# Altium PCB Starboard Solar Panel.PcbDoc (part 1 of 2)
Units mm, origin at the board's own origin, x right, y up, seen from the top; angles counter-clockwise.
Board outline 327.5 x 87 mm, 2 copper layers (Top Layer, Bottom Layer), stack 1.58 mm thick; 64 components, 43 nets, 245 pads, 1257 vias.
Unrouted connection lines stored in the file: 47.
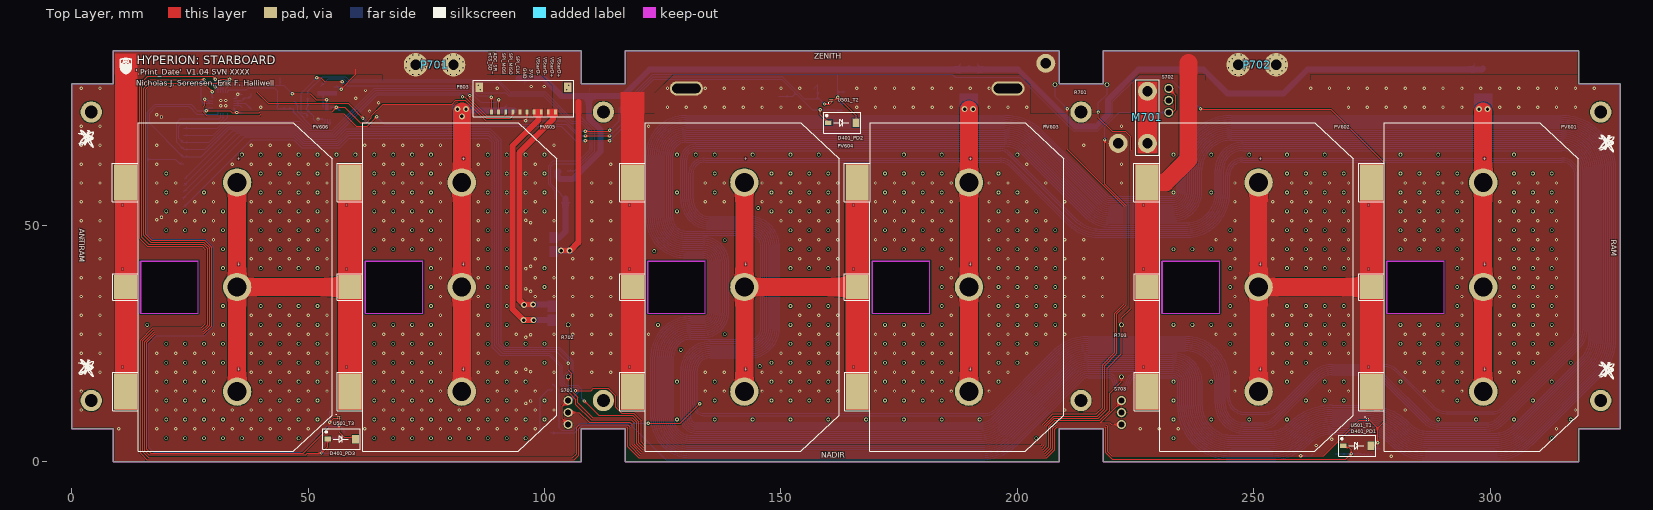
[diagram p0: Top Layer view]
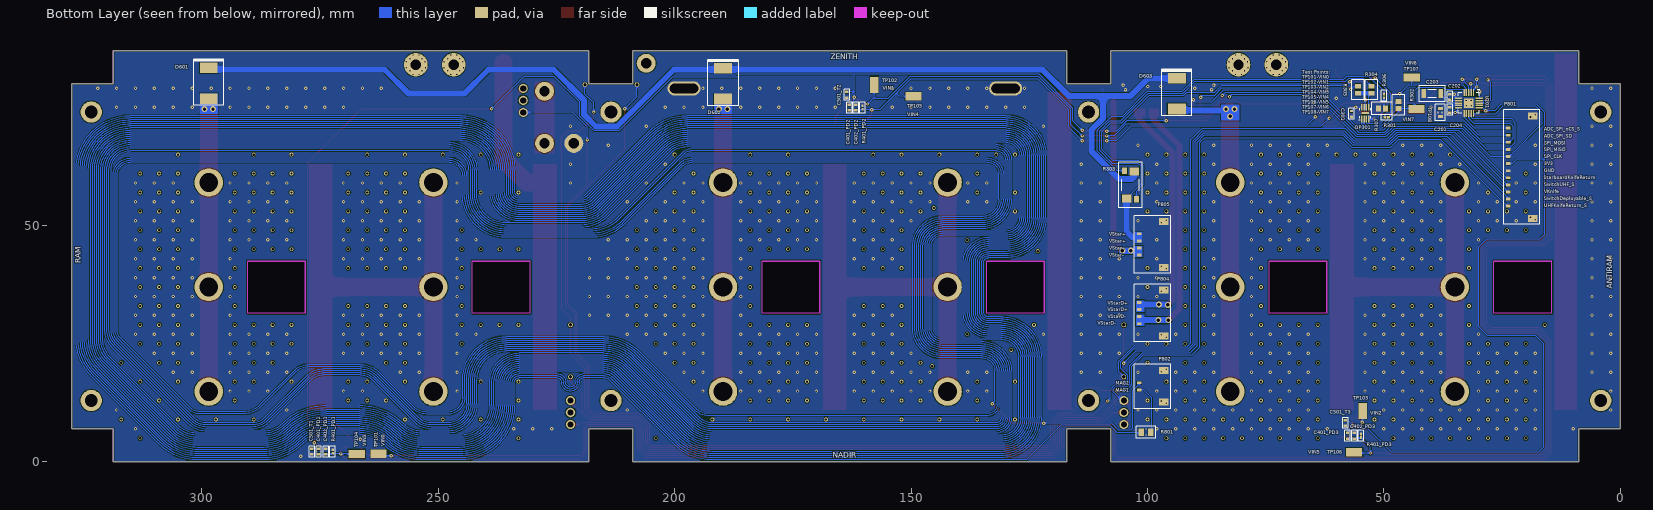
[diagram p1: Bottom Layer view, seen from below]
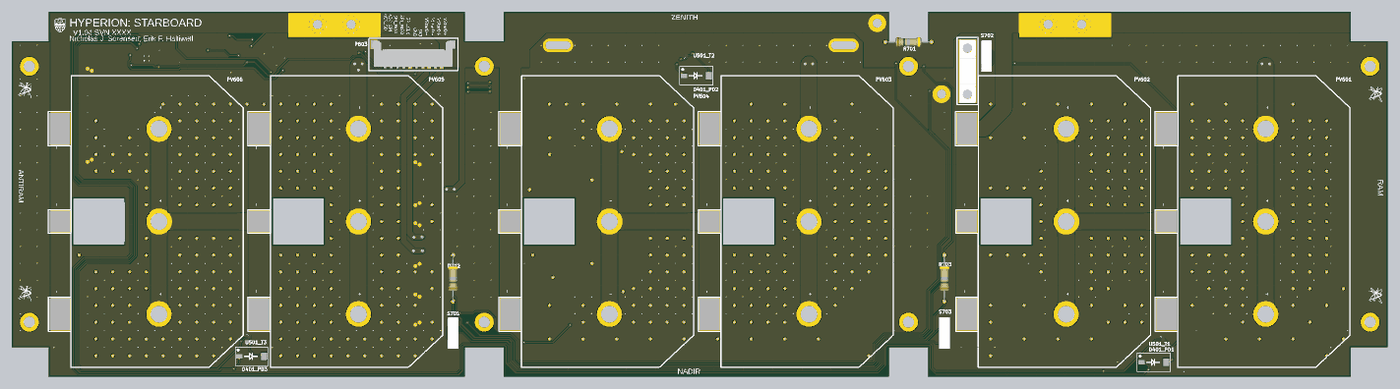
[diagram p3: 3D render of the assembled board from above, using the file's embedded part models]

## Layer stack, top to bottom
Top Solder: solder mask 0.0102, Solder Resist, Dk 3.5
Top Layer: signal copper 0.0711
Dielectric 1: dielectric 1.438, FR-4, Dk 4.8
Bottom Layer: signal copper 0.0711
Bottom Solder: solder mask 0.0102, Solder Resist, Dk 3.5

## Board outline
0,7 8.8,7 8.8,0 107.8,0 107.8,7 117.1,7 117.1,0 208.8,0 208.8,7 218.1,7 218.1,0 318.7,0 318.7,7 327.5,7 327.5,80 318.7,80 318.7,87 218.1,87 218.1,80 208.8,80 208.8,87 117.1,87 117.1,80 107.8,80 107.8,87 8.8,87 8.8,80 0,80
cut-out: 14.6,31.5 26.75,31.5 26.75,42.5 14.6,42.5
cut-out: 278.1,31.5 290.25,31.5 290.25,42.5 278.1,42.5
cut-out: 230.6,31.5 242.75,31.5 242.75,42.5 230.6,42.5
cut-out: 169.35,31.5 181.5,31.5 181.5,42.5 169.35,42.5
cut-out: 121.85,31.5 134,31.5 134,42.5 121.85,42.5
cut-out: 62.1,31.5 74.25,31.5 74.25,42.5 62.1,42.5

## Design rules (kind name [scope] priority, off if disabled: settings)
BoardOutlineClearance [All] p1: gap=0.254 ignorepadtopadclearanceinfootprint=FALSE
Clearance [All] p1: gap=0.178 ignorepadtopadclearanceinfootprint=FALSE
HoleSize [All] p1: absolutevalues=TRUE maxlimit=6 minlimit=0.2 maxpercent=80.000 minpercent=20.000
MinimumAnnularRing [All] p1: minimumring=0.15
MinimumSolderMaskSliver [All] p1: minsoldermaskwidth=0.127
PolygonConnect [All] p1: connectstyle=Direct reliefconductorwidth=0.254 reliefentries=4 polygonreliefangle="90 Angle" airgapwidth=0.254
RoutingCorners [All] p1: cornerstyle=Round minsetback=2.54 maxsetback=2.54
RoutingVias [All] p1: holewidth=0.33 width=0.711 viastyle="Through Hole" minholewidth=0.2 minwidth=0.711 maxholewidth=6 maxwidth=2.54
SilkToSilkClearance [All] p1: silktosilkclearance=0.127
SilkToSolderMaskClearance [IsPad] p1: minsilkscreentomaskgap=0.025 clearancetoexposedcopper=TRUE
SolderMaskExpansion [All] p1: expansion=0.102 istentingtop=FALSE
Width [All] p1: maxlimit=7.62 minlimit=0.203 preferedwidth=0.254
25 further rules are at their usual default settings.

## Classes and differential pairs
channel class Temp_Sensor: T1 T2 T3
channel class Photodiode_Sun_Sensor: T1 T2 T3
component class T3: C501_T3 U501_T3
component class T2: C501_T2 U501_T2
component class T1: C501_T1 U501_T1
component class Starboard: TP101 TP102 TP103 TP104 TP105 TP106 TP107 TP108
component class "Starboard Headers": P801 P802 P803 P804 P805 R801
component class PD3: C401_PD3 C402_PD3 D401_PD3 R401_PD3
component class PD2: C401_PD2 C402_PD2 D401_PD2 R401_PD2
component class PD1: C401_PD1 C402_PD1 D401_PD1 R401_PD1
component class "Mechanical Interfacing": M701 P701 P702 R701 R702 R703 S701 S702 S703
component class "Current and Voltage Sensors": C301 OP301 R301 R302 R303 R304 R305 R306 R307
net class VIN[0..7]: VIN0 VIN1 VIN2 VIN3 VIN4 VIN5 VIN6 VIN7
component class "U_AD7298 12-Bit SPI ADC": C201 C202 C203 C204 U201
component class "Photovoltaic Array": D601 D602 D603 PV601 PV602 PV603 PV604 PV605 PV606

## Components (designator, comment, footprint, x,y, rotation, side; value= is the part's Value field where it differs from the comment)
C201 "" TDK-CGA3E 38.05,73.9 r90 bottom value=1µF
C202 "" TDK-CGA2B 36.05,77.2 r90 bottom value=0.1µF
C203 "" TDK-CGA5L 39.8,77.9 r0 bottom value=10µF
C204 "" TDK-CGA2B 36.05,74.45 r90 bottom value=0.1µF
C301 "Cap" TDK-CGA2B 56.85,73.625 r90 bottom value=0.1µF
C401_PD1 "Cap" TDK-CGA2B 275.25,2.2 r90 bottom value=0.1µF (schematic designator C401)
C401_PD2 "Cap" TDK-CGA2B 163.05,74.95 r90 bottom value=0.1µF (schematic designator C401)
C401_PD3 "Cap" TDK-CGA2B 57.7,5.55 r90 bottom value=0.1µF (schematic designator C401)
C402_PD1 "Cap" TDK-CGA2B 273.75,2.2 r270 bottom value=100pF (schematic designator C402)
C402_PD2 "Cap" TDK-CGA2B 161.65,74.95 r270 bottom value=100pF (schematic designator C402)
C402_PD3 "Cap" TDK-CGA2B 56.25,5.55 r270 bottom value=100pF (schematic designator C402)
C501_T1 "Cap" TDK-CGA2B 276.7,2.2 r90 bottom value=0.1µF (schematic designator C501)
C501_T2 "Cap" TDK-CGA2B 163.55,77.65 r90 bottom value=0.1µF (schematic designator C501)
C501_T3 "Cap" TDK-CGA2B 58.15,8.25 r90 bottom value=0.1µF (schematic designator C501)
D401_PD1 "PDB-C160SMCT-ND" PDB-C160SM 268.9,3.428 r0 top (schematic designator D401)
D401_PD2 "PDB-C160SMCT-ND" PDB-C160SM 160,71.75 r0 top (schematic designator D401)
D401_PD3 "PDB-C160SMCT-ND" PDB-C160SM 54.15,4.85 r0 top (schematic designator D401)
D601 "MBRS410L" ONS-875 298.5,80.1 r90 bottom
D602 "MBRS410L" ONS-875 189.75,80 r90 bottom
D603 "MBRS410L" ONS-875 93.8,77.9 r90 bottom
M701 "Antenna_Saddle" ANTENNA_SADDLE 227.5,67.375 r90 top
OP301 "OPA2333" TI-DSG0008A 53.95,73.775 r90 bottom
P701 "Mounting_Hole" DEPHINGE_MOUNTING_HOLE_BODY 80.75,84 r180 top
P702 "Mounting_Hole" DEPHINGE_MOUNTING_HOLE_BODY 254.7,84 r180 top
P801 "WM16219CT-ND" MOLX-5040501291 23.7,62.35 r90 bottom
P802 "WM25693CT-ND" MOLX-5040500291 101.75,16 r90 bottom
P803 "WM10138CT-ND" MOLX-5040501091 95.55,74 r180 top
P804 "WM10137CT-ND" MOLX-5040500491 101.75,31.5 r90 bottom
P805 "WM10137CT-ND" MOLX-5040500491 101.75,46 r90 bottom
PV601 "XTJPrime" "XTJ PRIME" 298.5,37 r90 top
PV602 "XTJPrime" "XTJ PRIME" 251,37 r90 top
PV603 "XTJPrime" "XTJ PRIME" 189.75,37 r90 top
PV604 "XTJPrime" "XTJ PRIME" 142.25,37 r90 top
PV605 "XTJPrime" "XTJ PRIME" 82.5,37 r90 top
PV606 "XTJPrime" "XTJ PRIME" 35,37 r90 top
R301 "0.1% 1/16W" PANA-ERA2A 49.404,72.884 r180 bottom value=6.2k
R302 "0.1% 1/8W" PANA-ERA6A 46.922,75.5 r270 bottom value=1M
R303 "Res Sense" VSH-2512R4C 103.586,58.6 r270 bottom value=0.01
R304 "0.1% 1/8W" PANA-ERA6A 52.65,78.725 r270 bottom value=1M
R305 "0.1% 1/8W" PANA-ERA6A 55.45,78.725 r270 bottom value=845k
R306 "0.1% 1/16W" PANA-ERA2A 49.97,77.425 r270 bottom value=6.2k
R307 "0.1% 1/8W" PANA-ERA6A 50.4,74.75 r0 bottom value=1M
R401_PD1 "0.1% 1/16W" PANA-ERA2A 272.3,2.2 r270 bottom value=24k (schematic designator R401)
R401_PD2 "0.1% 1/16W" PANA-ERA2A 160.25,74.95 r270 bottom value=24k (schematic designator R401)
R401_PD3 "0.1% 1/16W" PANA-ERA2A 54.85,5.55 r270 bottom value=24k (schematic designator R401)
R701 "Res3" VSH-CPF1 207.95,79.8 r0 top value=21
R702 "Res3" VSH-CPF1 105,18 r90 top value=21
R703 "Res3" VSH-CPF1 222,18 r90 top value=21
R801 "Res3" VSH-0805MCU 100.3,6.3 r180 bottom value=0
S701 "AV4424" PANA-AV4424 105,13 r270 top
S702 "AV4424" PANA-AV4424 232,79 r270 top
S703 "AV4424" PANA-AV4424 222,13 r270 top
TP101 "5017" KS-5017 262.6,1.774 r180 bottom
TP102 "5017" KS-5017 157.8,79.75 r90 bottom
TP103 "5017" KS-5017 54.45,10.8 r90 bottom
TP104 "5017" KS-5017 267.2,1.7 r180 bottom
TP105 "5017" KS-5017 149.5,77.325 r180 bottom
TP106 "5017" KS-5017 56.3,2.1 r180 bottom
TP107 "5017" KS-5017 44.1,81.3 r180 bottom
TP108 "5017" KS-5017 43.13,74.65 r180 bottom
U201 "AD7298" ADI-CP-20-8 32.05,75.9 r270 bottom
U501_T1 "LMT70" TI-YFQ0004 274.05,9 r0 top (schematic designator U501)
U501_T2 "LMT70" TI-YFQ0004 160.55,76.45 r90 top (schematic designator U501)
U501_T3 "LMT70" TI-YFQ0004 56.5,9.45 r0 top (schematic designator U501)

## Footprints (in the part's own frame and the unit in brackets; to place one, negate y for a bottom-side part, rotate by r counter-clockwise, add the part's x,y. Pads: shape width x height; smd on the part's side, far side on the other; paste and mask are expansions set on the pad)
ADI-CP-20-8 [mm] "QFN, 20-Leads, Body 4.00x4.00mm, Pitch 0.50mm, Thermal Pad 2.55x2.55mm, IPC Low Density"
  rect 1.5x0.3 smd: 1(-2.2,1) 2(-2.2,0.5) 3(-2.2,0) 4(-2.2,-0.5) 5(-2.2,-1) 11(2.2,-1) 12(2.2,-0.5) 13(2.2,0) 14(2.2,0.5) 15(2.2,1)
  rect 0.3x1.5 smd: 6(-1,-2.2) 7(-0.5,-2.2) 8(0,-2.2) 9(0.5,-2.2) 10(1,-2.2) 16(1,2.2) 17(0.5,2.2) 18(0,2.2) 19(-0.5,2.2) 20(-1,2.2)
  rect 2x2 smd: 21(0,0)
  silkscreen extent -2.97,-2.2 2.2,2.2, body extent -2.07,-2.07 2.07,2.07, height 0.8
ANTENNA_SADDLE [mm] "Saddle for attaching antenna to panel"
  round 4 hole 2.2: 8(0,0) 8(11,0)
  Top Layer region: -2.125,-2.125 13.125,-2.125 13.125,2.125 -2.125,2.125
  silkscreen extent -2.5,-2.5 13.5,2.5, body extent -2.06,-2 12.94,2, height 6.91
DEPHINGE_MOUNTING_HOLE_BODY [mm]
  round 5 hole 2.2: 1(0,0) 1(8,0)
  Top Layer region: 3.2,-3.2
KS-5017 [mil] "Testpoint Lug Mini SMD 27X10X152"
  rect 135x70 smd: 1(0,0)
  body extent -53,-20 53,20, height 60
MOLX-5040500291 [mm]
  rect 0.6x1 smd: 1(-0.75,0) 2(0.75,0)
  oval 0.711x0.711 hole 0.33: M1(-3.605,-5.7) M1(-3.105,-4.7) M2(3.105,-4.7) M2(3.605,-5.7)
  rect 1.5x2 smd: M1(-3.355,-5.2) M2(3.355,-5.2)
  silkscreen extent -4.7,-6.7 4.7,1
MOLX-5040500491 [mm]
  rect 0.6x1 smd: 1(-2.25,0) 2(-0.75,0) 3(0.75,0) 4(2.25,0)
  oval 0.711x0.711 hole 0.33: M1(-5.105,-5.7) M1(-4.605,-4.7) M2(4.605,-4.7) M2(5.105,-5.7)
  rect 1.5x2 smd: M1(-4.855,-5.2) M2(4.855,-5.2)
  silkscreen extent -6.1,-6.7 6.1,1, body extent -5.28,-6.05 5.28,0.39, height 2.01
MOLX-5040501091 [mm]
  rect 0.6x1 smd: 1(-6.75,0) 2(-5.25,0) 3(-3.75,0) 4(-2.25,0) 5(-0.75,0) 6(0.75,0) 7(2.25,0) 8(3.75,0) 9(5.25,0) 10(6.75,0)
  oval 0.711x0.711 hole 0.33: M1(-9.605,-5.7) M1(-9.105,-4.7) M2(9.105,-4.7) M2(9.605,-5.7)
  rect 1.5x2 smd: M1(-9.355,-5.2) M2(9.355,-5.2)
  silkscreen extent -10.6,-6.7 10.6,1, body extent -9.78,-6.05 9.77,0.39, height 2.01
MOLX-5040501291 [mm]
  rect 0.6x1 smd: 1(-8.25,0) 2(-6.75,0) 3(-5.25,0) 4(-3.75,0) 5(-2.25,0) 6(-0.75,0) 7(0.75,0) 8(2.25,0) 9(3.75,0) 10(5.25,0) 11(6.75,0) 12(8.25,0)
  oval 0.711x0.711 hole 0.33: M1(-11.105,-5.7) M1(-10.605,-4.7) M2(10.605,-4.7) M2(11.105,-5.7)
  rect 1.5x2 smd: M1(-10.855,-5.2) M2(10.855,-5.2)
  silkscreen extent -12.1,-6.7 12.1,1, body extent -11.27,-6.05 11.27,0.39, height 2.01
ONS-875 [mm]
  rect 2.25x3.79 smd: 1(-3.25,0) 2(3.25,0)
  silkscreen extent -4.7,-3.2 5.1,3.2, body extent -3.97,-2.95 3.98,2.95, height 2.32
PANA-AV4424 [mm]
  round 1.905 hole 1.27: 1(2.54,0) 2(0,0) 3(5.08,0)
  body extent -1.21,-1.25 6.29,1.25, height 5.81
PANA-ERA2A [mm] "Chip Resistor, 2-Leads, Body 1.00x0.52mm, IPC High Density"
  rect 0.57x0.5 smd: 1(-0.376,0) 2(0.376,0)
  silkscreen extent -1.15,-0.58 1.15,0.58, body extent -0.55,-0.3 0.55,0.3, height 0.4
PANA-ERA6A [mm] "Chip Resistor, 2-Leads, Body 2.00x1.25mm, IPC High Density"
  rect 1x1.25 smd: 1(-0.75,0) 2(0.75,0)
  silkscreen extent -2.15,-1.3 2.15,1.3, body extent -1.1,-0.67 1.1,0.67, height 0.6
PDB-C160SM [mm] "Photodiode"
  rect 1.45x1 smd: 1(0,0)
  rect 1.45x1.8 smd: 2(5.9,0)
  silkscreen extent -1,-2.2 6.9,2.2
TDK-CGA2B [mm] "Chip Capacitor, 2-Leads, Body 1.00x0.50mm, IPC Low Density"
  rect 0.52x0.72 smd: 1(-0.6,0) 2(0.6,0)
  silkscreen extent -1.15,-0.58 1.15,0.58, body extent -0.52,-0.28 0.53,0.27, height 0.5
TDK-CGA3E [mm] "Chip Capacitor, 2-Leads, Body 1.60x0.80mm, IPC Low Density"
  rect 0.65x1.05 smd: 1(-0.85,0) 2(0.85,0)
  silkscreen extent -1.7,-1.05 1.7,1.05, body extent -0.85,-0.45 0.85,0.45, height 0.8
TDK-CGA5L [mm] "Chip Capacitor, 2-Leads, Body 3.20x1.60mm, IPC Low Density"
  rect 0.95x1.9 smd: 1(-1.775,0) 2(1.775,0)
  silkscreen extent -2.75,-1.7 2.75,1.7, body extent -1.7,-0.9 1.7,0.9, height 1.6
TI-DSG0008A [mm] "SON, 8-Leads, Body 2.00x2.00mm, Pitch 0.50mm, Thermal Pad 1.60x0.69mm, IPC Low Density"
  rect 1.4x0.3 smd: 1(-1.245,0.75) 2(-1.245,0.25) 3(-1.245,-0.25) 4(-1.245,-0.75) 5(1.245,-0.75) 6(1.245,-0.25) 7(1.245,0.25) 8(1.245,0.75)
  rect 0.4x1.6 smd: 9(0,0)
  silkscreen extent -1.5,-1.2 1.05,1.25, body extent -1.05,-1.05 1.05,1.05, height 0.8
TI-YFQ0004 [mm] "BGA, 4-Leads, Body 0.88x0.88mmx0.68mm, Pitch 0.40mm"
  round 0.22 smd: A1(-0.2,0.2) A2(0.2,0.2) B1(-0.2,-0.2) B2(0.2,-0.2)
  silkscreen extent -0.59,0.5 -0.5,0.59, body extent -0.44,-0.44 0.44,0.44, height 0.67
VSH-0805MCU [mm] "Chip Resistor, 2-Leads, Body 2.00x1.25mm, IPC Low Density"
  rect 1.15x1.5 smd: 1(-1.025,0) 2(1.025,0)
  silkscreen extent -2.1,-1.25 2.1,1.25, body extent -1.05,-0.7 1.05,0.7, height 0.55
VSH-2512R4C [mm]
  rect 1.65x2.01 smd: 1(-2.855,0.835) 2(2.855,-0.835)
  rect 1.39x1.14 smd: 3(2.999,1.27) 4(-2.999,-1.27)
  silkscreen extent -4.8,-2.45 4.8,2.45
VSH-CPF1 [mm] "RESISTOR METAL FILM 1W 1.00K OHM"
  round 1 hole 0.7: 1(0,0) 2(11,0)
  body extent 0.25,-1.16 10.76,2.29, height 3.81
"XTJ PRIME" [mil] "Spectrolab Solar Cell"
  round 236.22 hole 157.48: 1(-870.5,0) 1(0,0) 1(870.5,0)
  rect 300x190 smd: 2(-870.5,930) 2(870.5,930)
  rect 200x190 smd: 2(0,930)
  silkscreen extent -1369,-790 1369,1038, body extent -1356,-778 1356,778, height 13

## Part data
C201: library part PC-TDK-02603, "CAP CER 1UF 25V X7R 0603", Manufacturer Part Number=CGA3E1X7R1E105K080AC, Supplier Part Number 1=445-6931-1-ND, Temperature Coefficient=X7R, Tolerance=±10%, Voltage - Rated=25V, Applications=Automotive, Index=2603, LatestRevisionDate=3/16/2016, LatestRevisionNote=..., PackageReference="0603 (1608 Metric)", Part Number=PC-TDK-02603, Published=3/16/2016, Publisher=AlbertaSat, Supplier 1=Digi-key, Supplier Link=http://www.digikey.ca/product-search/en?keywords=445-6931-1-ND
C202 C204 C401_PD1 C401_PD2 C401_PD3 C501_T1 C501_T2 C501_T3: library part PC-TDK-02259, "CAP CER 0.1UF 50V X7R 0402", Manufacturer Part Number=CGA2B3X7R1H104K050BB, Supplier Part Number 1=445-6899-1-ND, Temperature Coefficient=X7R, Tolerance=±10%, Voltage - Rated=50V, Applications=Automotive, Index=2259, LatestRevisionNote=..., PackageReference="0402 (1005 Metric)", Part Number=PC-TDK-02259, Publisher=AlbertaSat, Supplier 1=Digi-key, Supplier Link=http://www.digikey.ca/product-search/en?keywords=445-6899-1-ND
  C202 C204: LatestRevisionDate=3/16/2016, Published=3/16/2016
  C401_PD1 C401_PD2 C401_PD3 C501_T1 C501_T2 C501_T3: LatestRevisionDate=2016-03-16, PackageDescription="Radial Cap, Thru-Hole; 2 Leads; 0.3 in Pin Spacing", Published=2016-03-16
C203: library part PC-TDK-02917, "CAP CER 10UF 25V X7R 1206", Manufacturer Part Number=CGA5L1X7R1E106K160AC, Supplier Part Number 1=445-6990-1-ND, Temperature Coefficient=X7R, Tolerance=±10%, Voltage - Rated=25V, Applications=Automotive, Index=2917, LatestRevisionDate=3/16/2016, LatestRevisionNote=..., PackageReference="1206 (3216 Metric)", Part Number=PC-TDK-02917, Published=3/16/2016, Publisher=AlbertaSat, Supplier 1=Digi-key, Supplier Link=http://www.digikey.ca/product-search/en?keywords=445-6990-1-ND
C301: library part PC-TDK-02255, "CAP CER 0.1UF 35V X7R 0402", Manufacturer Part Number=CGA2B3X7R1V104K050BB, Supplier Part Number 1=445-6901-1-ND, Temperature Coefficient=X7R, Tolerance=±10%, Voltage - Rated=35V, Applications=Automotive, Index=2255, LatestRevisionDate=2016-03-16, LatestRevisionNote=..., PackageDescription="Radial Cap, Thru-Hole; 2 Leads; 0.3 in Pin Spacing", PackageReference="0402 (1005 Metric)", Part Number=PC-TDK-02255, Published=2016-03-16, Publisher=AlbertaSat, Supplier 1=Digi-key, Supplier Link=http://www.digikey.ca/product-search/en?keywords=445-6901-1-ND
C402_PD1 C402_PD2 C402_PD3: library part PC-TDK-01227, "CAP CER 100PF 50V C0G 0402", Manufacturer Part Number=CGA2B2C0G1H101J050BA, Supplier Part Number 1=445-5596-1-ND, Temperature Coefficient=NP0, Tolerance=±5%, Voltage - Rated=50V, Applications=Automotive, Index=1227, LatestRevisionDate=2016-03-16, LatestRevisionNote=..., PackageDescription="Radial Cap, Thru-Hole; 2 Leads; 0.3 in Pin Spacing", PackageReference="0402 (1005 Metric)", Part Number=PC-TDK-01227, Published=2016-03-16, Publisher=AlbertaSat, Supplier 1=Digi-key, Supplier Link=http://www.digikey.ca/product-search/en?keywords=445-5596-1-ND
D401_PD1 D401_PD2 D401_PD3: library part PXX-ADP-00000, "SENSOR PHOTODIODE 850NM 2SMD GW", Manufacturer Part Number="Advanced Photonics", Index=1, LatestRevisionDate=3/28/2020, LatestRevisionNote=..., PackageReference=PIN2, Part Number=PXX-ADP-00000, Published=3/28/2020, Publisher=AlbertaSat, Supplier 1=Digi-key, Supplier Part Number 1=PDB-C160SMCT-ND
D601 D602 D603: library part PXX-ONS-00003, "SCHOTTKY BARRIER / RECTIFIERS / 4.0 AMPERES, 10 VOLTS, V_F = 0.31V", Supplier Part Number 1=MBRS410LT3-D, Code_JEDEC=DO-214-AA, Index=3, LatestRevisionDate=1/18/2020, LatestRevisionNote=..., Manufacturer Part Number=MBRS410L, PackageDescription="DO-214-AA/SMB; 2 C-Bend Leads; Body 5.3 x 3.6 mm, inc. leads (LxW)", PackageReference=SMB, Part Number=PXX-ONS-00003, Published=1/18/2020, Publisher=AlbertaSat, Supplier 1=Digi-key, Supplier Link=#https://www.digikey.com/product-detail/en/on-semiconductor/MBRS410LT3G/MBRS410LT3GOSCT-ND/1967073#
M701: library part PXX-ABS-00001, Manufacturer Part Number=Custom, Index=1, LatestRevisionNote=..., Part Number=PXX-ABS-00001, Publisher=AlbertaSat, Supplier 1=Digi-key
OP301: library part 73, "CMOS Amplifier 2 Circuit Rail-to-Rail 8-WSON (2x2)", Manufacturer Part Number=OPA2333PIDSGR, Operating Temperature="-55°C ~ 150°C", Supplier Part Number 1=296-51501-1-ND, Voltage - Supply="1.8V ~ 5.5V, ±0.9V ~ 2.75V", PackageReference="8-WFDFN Exposed Pad", Part Number=73, Supplier 1=Digi-Key, Supplier 2=Mouser, Supplier Link=#https://www.digikey.ca/product-detail/en/texas-instruments/OPA2333PIDSGR/296-51501-1-ND/9745865#, Supplier Part Number 2=595-OPA2333PIDSGR
P701 P702: library part PXX-ABS-00004, Manufacturer Part Number=Custom, Index=4, LatestRevisionNote=..., Part Number=PXX-ABS-00004, Publisher=AlbertaSat, Supplier 1=Digi-key
P801: library part 71, "CONN HEADER SMD R/A 12POS 1.5MM", Manufacturer Part Number=5040501291, LatestRevisionDate=17-Jul-2002, LatestRevisionNote="Re-released for DXP Platform.", Part Number=71, Publisher="Altium Limited", Supplier 1=Digi-Key, Supplier Link=#https://www.digikey.ca/product-detail/en/molex/5040501291/WM16219CT-ND/6702294#, Supplier Part Number 1=WM16219CT-ND
P802: library part 61, "CONN HEADER SMD R/A 2POS 1.5MM", Manufacturer Part Number=5040500291, LatestRevisionDate=17-Jul-2002, LatestRevisionNote="Re-released for DXP Platform.", Part Number=61, Publisher="Altium Limited", Supplier 1=Digi-Key, Supplier Link=#https://www.digikey.ca/product-detail/en/molex/5040500291/WM25693CT-ND/9954119#, Supplier Part Number 1=WM25693CT-ND
P803: library part 69, "CONN HEADER SMD R/A 10POS 1.5MM", Manufacturer Part Number=5040501091, LatestRevisionDate=17-Jul-2002, LatestRevisionNote="Re-released for DXP Platform.", Part Number=69, Publisher="Altium Limited", Supplier 1=Digi-Key, Supplier Link=#https://www.digikey.ca/product-detail/en/molex/5040501091/WM10138CT-ND/4357655#, Supplier Part Number 1=WM10138CT-ND
P804 P805: library part 63, "CONN HEADER SMD R/A 4POS 1.5MM", Manufacturer Part Number=5040500491, LatestRevisionDate=17-Jul-2002, LatestRevisionNote="Re-released for DXP Platform.", Part Number=63, Publisher="Altium Limited", Supplier 1=Digi-Key, Supplier Link=#https://www.digikey.ca/product-detail/en/molex/5040500491/WM10137CT-ND/4357653#, Supplier Part Number 1=WM10137CT-ND
PV601 PV602 PV603 PV604 PV605 PV606: library part PBT-SPEC-00002, Manufacturer Part Number=Spectrolab, Supplier Part Number 1="UTJ CIC 26.26cm^2", Index=2, LatestRevisionNote=..., PackageReference="3-Connector Solar Cell", Part Number=PBT-SPEC-00002, Publisher=AlbertaSat, Supplier 1=Spectrolab
R301 R306: library part 16853, "RES SMD 6.2K OHM 0.1% 1/16W 0402", Manufacturer Part Number=ERA-2APB622X, Power="0.063W, 1/16W", Supplier Part Number 1=P6.2KCNCT-ND, Temperature Coefficient=±15ppm/°C, Tolerance=±0.1%, LatestRevisionDate=29-May-2009, LatestRevisionNote="IPC-7351 Footprint Added.", PackageDescription="Chip Resistor, 2-Leads, Body 1.00x0.50mm, IPC Low Density", PackageReference="0402 (1005 Metric)", Part Number=16853, Published=8-Jun-2000, Publisher="Altium Limited", Supplier 1=Digi-Key, Supplier Link=http://www.digikey.ca/product-search/en?keywords=P6.2KCNCT-ND
R302 R304 R307: library part 19706, "RES SMD 1M OHM 0.1% 1/8W 0805", Manufacturer Part Number=ERA-6AEB105V, Power="0.125W, 1/8W", Supplier Part Number 1=P1MDACT-ND, Temperature Coefficient=±25ppm/°C, Tolerance=±0.1%, LatestRevisionDate=29-May-2009, LatestRevisionNote="IPC-7351 Footprint Added.", PackageDescription="Chip Resistor, 2-Leads, Body 2.00x1.25mm, IPC Low Density", PackageReference="0805 (2012 Metric)", Part Number=19706, Published=8-Jun-2000, Publisher="Altium Limited", Supplier 1=Digi-Key, Supplier Link=http://www.digikey.ca/product-search/en?keywords=P1MDACT-ND
R303: library part PR-VSH-00237, "RES SMD 0.01 OHM 0.1% 1W 2512", Manufacturer Part Number=Y14870R01000B9W, Power - Rated=1W, Supplier Part Number 1=Y1487-.01-ND, Temperature Coefficient=±15ppm/°C, Tolerance=±0.1%, Applications=Automotive, Index=237, LatestRevisionDate=2017-07-12, LatestRevisionNote=..., PackageReference=VSH-2512R4C, Part Number=PR-VSH-00237, Published=2017-07-12, Publisher=AlbertaSat, Supplier 1=Digi-key, Supplier Link=http://www.digikey.ca/product-search/en?keywords=Y1487-.01-ND
R305: library part 19643, "RES SMD 845K OHM 0.1% 1/8W 0805", Manufacturer Part Number=ERA-6AEB8453V, Power="0.125W, 1/8W", Supplier Part Number 1=P845KDACT-ND, Temperature Coefficient=±25ppm/°C, Tolerance=±0.1%, LatestRevisionDate=29-May-2009, LatestRevisionNote="IPC-7351 Footprint Added.", PackageDescription="Chip Resistor, 2-Leads, Body 2.00x1.25mm, IPC Low Density", PackageReference="0805 (2012 Metric)", Part Number=19643, Published=8-Jun-2000, Publisher="Altium Limited", Supplier 1=Digi-Key, Supplier Link=http://www.digikey.ca/product-search/en?keywords=P845KDACT-ND
R401_PD1 R401_PD2 R401_PD3: library part 17830, "RES SMD 24K OHM 0.1% 1/16W 0402", Manufacturer Part Number=ERA-2APB243X, Power="0.063W, 1/16W", Supplier Part Number 1=P24KCNCT-ND, Temperature Coefficient=±15ppm/°C, Tolerance=±0.1%, LatestRevisionDate=29-May-2009, LatestRevisionNote="IPC-7351 Footprint Added.", PackageDescription="Chip Resistor, 2-Leads, Body 1.00x0.50mm, IPC Low Density", PackageReference="0402 (1005 Metric)", Part Number=17830, Published=8-Jun-2000, Publisher="Altium Limited", Supplier 1=Digi-Key, Supplier Link=http://www.digikey.ca/product-search/en?keywords=P24KCNCT-ND
R701 R702 R703: library part PR-VSH-00317, "21 Ohms ±1% 1W Through Hole Resistor Axial Flame Proof, Moisture Resistant, Safety Metal Film", Manufacturer Part Number=CPF121R000FKEE6, Power - Rated=1W, Supplier Part Number 1=CPF21.0CCT-ND, Temperature Coefficient=±100ppm/°C, Tolerance=±1%, Index=317, LatestRevisionDate=2/27/2020, LatestRevisionNote=..., PackageDescription="Chip Resistor", PackageReference=VSH-CPF1, Part Number=PR-VSH-00317, Published=2/27/2020, Publisher=AlbertaSat, Supplier 1=Digi-key, Supplier Link=#https://www.digikey.ca/product-detail/en/vishay-dale/CPF121R000FKEE6/CPF21.0CCT-ND/2713126#
R801: library part PR-VSH-00003, "RES SMD 0.0 OHM JUMPER 1/5W 0805", Manufacturer Part Number=MCU08050Z0000ZP500, Power - Rated=1/5W, Supplier Part Number 1=MCU0805-0.0-ZZCT-ND, Temperature Coefficient=-, Tolerance=Jumper, Applications="General Purpose", Index=3, LatestRevisionDate=3/14/2016, LatestRevisionNote=..., PackageDescription="Chip Resistor, 2-Leads, Body 2.00x1.25mm, IPC Low Density", PackageReference="0805 (2012 Metric)", Part Number=PR-VSH-00003, Published=3/14/2016, Publisher=AlbertaSat, Supplier 1=Digi-key, Supplier Link=http://www.digikey.ca/product-search/en?keywords=MCU0805-0.0-ZZCT-ND
S701 S702 S703: library part 20035, "SWITCH SNAP ACT SPDT 500MA 30V", Supplier Part Number 1=255-3743-ND, Manufacturer Part Number=AV4424, Part Number=20035, Supplier 1=Digi-Key, Supplier Link=#https://www.digikey.com/product-detail/en/panasonic-electric-works/AV4424/255-3743-ND/646766#
TP101 TP102 TP103 TP104 TP105 TP106 TP107 TP108: library part PTP-KS-00001, "PC TEST POINT MINI SMD", Supplier Part Number 1=36-5017CT-ND, Index=1, LatestRevisionDate=3/15/2016, LatestRevisionNote=..., Manufacturer Part Number=5017, PackageDescription="Testpoint Lug Mini SMD 27X10X152", PackageReference=KS-5017, Part Number=PTP-KS-00001, Published=3/15/2016, Publisher=AlbertaSat, Supplier 1=Digi-key, Supplier 2=Newark, Supplier 3=Mouser, Supplier Link=http://www.digikey.ca/product-detail/en/keystone-electronics/5017/36-5017TR-ND/2217304
U201: library part PU-ADI-00007, "IC ADC 12BIT SAR 20LFCSP-WQ", Manufacturer Part Number=AD7298BCPZ, Supplier Part Number 1=AD7298BCPZ-ND, Index=7, LatestRevisionDate=7/16/2019, LatestRevisionNote=..., PackageDescription="QFN, 20-Leads, Body 4.00x4.00mm, Pitch 0.50mm, Thermal Pad 2.55x2.55mm, IPC Low Density", PackageReference="20-WFQFN Exposed Pad", Part Number=PU-ADI-00007, Published=7/16/2019, Publisher=AlbertaSat, Supplier 1=Digi-key, Supplier 2=Mouser, Supplier Link=#https://www.digikey.ca/product-detail/en/analog-devices-inc/AD7298BCPZ/AD7298BCPZ-ND/2507320#, Supplier Part Number 2=584-AD7298BCPZ
U501_T1 U501_T2 U501_T3: library part 70, "Temperature Sensor Analog, Local -55°C ~ 150°C 5.194mV/°C 4-DSBGA (0.81x0.81)", Manufacturer Part Number=LMT70YFQR, Operating Temperature="-55°C ~ 150°C", Supplier Part Number 1=296-47337-1-ND, PackageReference="BGA, 4-Leads, Body 0.88x0.88mmx0.68mm, Pitch 0.40mm", Part Number=70, Supplier 1=Digi-Key, Supplier Link=#https://www.digikey.ca/product-detail/en/texas-instruments/LMT70YFQR/296-47337-1-ND/7688347#

## Free pads (board coordinates)
  round 4 hole 2.2: 3(206,84.3) 3(221.3,67.375)
  oval 7x3 hole 2 slot 6 at 0 deg: 5(129.997,79) 5(198,79)
  round 4.5 hole 2.7: CHASSIS(4.15,13) CHASSIS(4.15,74) CHASSIS(112.45,13) CHASSIS(112.45,74) CHASSIS(213.45,13) CHASSIS(213.45,74) CHASSIS(323.35,13) CHASSIS(323.35,74)

## Via types
v1: diameter 0.711, hole 0.3, Top Layer to Bottom Layer, tented both sides, 677 vias
v2: diameter 0.8, hole 0.5, Top Layer to Bottom Layer, 519 vias
v3: diameter 0.655, hole 0.25, Top Layer to Bottom Layer, 48 vias
v4: diameter 1.27, hole 0.711, Top Layer to Bottom Layer, tented both sides, 13 vias

## Nets (pads, with @x,y where several pads share a name; then routed paths per layer and width w, separated by ;. In a path a pad name is that pad's centre, name@x,y a point inside that pad or via, vN(x,y) a via of type N, cw(c..) or ccw(c..) an arc to the next point about the centre after c; other vN are vias at no path point)
3V3: C204.1 C301.2 C401_PD1.2 C401_PD2.2 C401_PD3.2 C501_T1.2 C501_T2.2 C501_T3.2 D401_PD1.2 D401_PD2.2 D401_PD3.2 OP301.8 P801.7 P803.5 U201.10 U201.16 U501_T1.A2 U501_T1.B2 U501_T2.A2 U501_T2.B2 U501_T3.A2 U501_T3.B2 | length 546.3
  Top Layer w0.203: v1(56.55,7.8) 56.7,7.95 U501_T3.B2@56.7,9.25 U501_T3.A2@56.7,9.65 ; U501_T2.A2@160.35,76.65 U501_T2.B2@160.75,76.65 161.516,76.65 161.966,77.1 v1(162,77.1) ; U501_T1.B2@274.25,8.8 274.25,8.998 ; U501_T1.A2@274.25,9.2 274.25,8.998 ; 276.148,7.1 274.25,8.998
  Top Layer w0.254: v1(28.45,74.3) 33.55,74.3 33.95,73.9 v1(34.9,73.9) 39.67,73.9 39.886,74.116 55.066,74.116 v1(55.95,75) 57.75,75 61,71.75 62.4,71.75 63.4,72.75 63.4,73.25 65.85,75.7 80.447,75.7 81.197,76.45 83.275,76.45 87.533,72.192 v1(96,72.192) 96,72.316 96.3,72.616 P803.5@96.3,74 ; v1(56.55,7.8) 56.55,6.323 57.649,5.225 D401_PD3.2@60.05,5.225 ; v1(108.6,69.95) v1@113.572,69.95 ; v1(162,77.1) 165.9,73.2 D401_PD2.2@165.9,71.75 ; v1@238.7,74.6 266.281,74.6 277.45,63.431 277.45,63.331 277.605,63.176 277.605,8.557 276.148,7.1 v1@276.148,4.1 ; D401_PD1.2@274.675,3.553 D401_PD1.2@274.8,3.428 274.951,3.579 275.679,3.579 v1(276.2,4.1)
  Bottom Layer w0.254: P801.7@23.7,63.1 23.685,63.115 22.819,63.115 21.934,64 16.005,64 ; U201.16@29.85,74.9 29.337,74.9 29.335,74.898 29.048,74.898 v1(28.45,74.3) 26.6,74.3 25.288,75.612 17.662,75.612 16.005,73.955 16.005,64 ; U201.10@34.25,74.9 34.377,74.9 34.379,74.898 34.379,74.421 v1(34.9,73.9) 34.925,73.875 36.025,73.875 C204.1@36.05,73.85 ; OP301.8@54.7,75.02 55.955,75.02 56.75,74.225 C301.2@56.85,74.225 ; C401_PD3.2@57.7,6.15 57.692,6.15 57.559,6.283 57.559,6.791 v1(56.55,7.8) ; C501_T3.2@58.15,8.85 58.017,8.717 57.467,8.717 v1(56.55,7.8) ; v1(96,72.192) 104.368,72.192 106.611,69.95 v1(108.6,69.95) ; v1(113.8,70.178) 115.75,72.128 115.75,74.85 122.9,82 161.95,82 161.951,81.999 ; C401_PD2.2@163.05,75.55 162.95,75.55 162.817,75.683 162.817,75.783 162.037,76.563 162.037,77.05 162,77.087 162,78.25 ; C501_T2.2@163.55,78.25 162,78.25 ; v1(238.7,74.7) 231.9,81.5 225.429,81.5 220.075,76.146 220.075,73.075 216.997,69.997 211.792,69.997 200.439,81.35 186.9,81.35 186.251,81.999 161.951,81.999 ; C401_PD1.2@275.017,3.033 275.017,2.933 275.15,2.8 C401_PD1.2@275.25,2.8 276.2,2.8 ; v1(276.2,4.1) 276.2,2.8 ; C501_T1.2@276.7,2.8 276.2,2.8 ; 16.005,64 16.005,48.195 17.105,47.095 28.355,47.095 29.9,45.55 29.9,28.6 28.025,26.725 17.875,26.725 16.2,25.05 16.2,3.2 17.35,2.05 48.35,2.05 53.9,7.6 56.35,7.6 v1(56.55,7.8) ; 161.951,81.999 162,81.95 162,78.25
ADC_SPI_nCS_S: P801.12 U201.11 | length 11.1
  Bottom Layer w0.254: P801.12@23.7,70.6 30.792,70.6 33.048,72.856 33.048,73.698 U201.11@33.05,73.7
ADC_SPI_nCS_SD: P801.11 P803.10 | length 74.7
  Top Layer w0.254: v1(88.771,77.15) 88.8,77.121 P803.10@88.8,74
  Bottom Layer w0.254: P801.11@23.7,69.1 29.939,69.1 32.893,72.055 48.232,72.055 50.159,70.128 55.114,70.128 63.989,79.003 84.348,79.003 85.85,77.5 88.421,77.5 v1(88.771,77.15)
GND: C201.1 C202.2 C203.2 C204.2 C301.1 C402_PD1.1 C402_PD2.1 C402_PD3.1 C501_T1.1 C501_T2.1 C501_T3.1 OP301.4 P801.6 P801.M1 P801.M2 P802.M1 P802.M2 P803.6 P803.M1 P803.M2 P804.M1 P804.M2 P805.M1 P805.M2 pad.3@221.3,67.375 pad.5 R307.2 R401_PD1.1 R401_PD2.1 R401_PD3.1 S702.1 S703.1 U201.6 U201.9 U201.21 U501_T1.A1 U501_T2.A1 U501_T3.A1 | length 5.6
  Bottom Layer w0.254: U201.9@34.25,75.4 35.6,75.4 35.95,75.05 C204.2@36.05,75.05 ; U201.6@34.25,76.9 34.85,76.9 34.873,76.923 34.873,77.447 35.1,77.674 v1(35.1,77.798) v1(35.1,77.798) 36.049,77.799 C202.2@36.05,77.8 ; v1(52.1,72.52) 53.19,72.52 OP301.4@53.2,72.53
  other v1: 279.012,1.2 263.2,3.49 266.5,4.775 10,7 18,7 22,7 26,7 30,7 34,7 38,7 42,7 46,7 50,7 62,7 66,7 70,7 74,7 78,7 82,7 86,7 90,7 94,7 98,7 226,7 230,7 234,7 314,7 2,11 18,11 22,11 26,11 30,11 34,11 38,11 42,11 46,11 50,11 66,11 70,11 74,11 78,11 82,11 86,11 90,11 94,11 98,11 102,11 210,11 282,11 318,11 2,15 18,15 22,15 26,15 30,15 42,15 46,15 50,15 54,15 66,15 70,15 74,15 78,15 90,15 94,15 98,15 134,15 138,15 146,15 150,15 154,15 158,15 162,15 170,15 174,15 178,15 182,15 186,15 194,15 246,15 266,15 270,15 286,15 290,15 294,15 2,19 6,19 18,19 22,19 26,19 30,19 38,19 42,19 46,19 50,19 54,19 66,19 70,19 74,19 78,19 86,19 90,19 94,19 102,19 110,19 114,19 134,19 138,19 146,19 150,19 154,19 158,19 162,19 170,19 174,19 178,19 182,19 186,19 194,19 198,19 246,19 254,19 258,19 282,19 286,19 290,19 294,19 302,19 306,19 2,23 6,23 18,23 22,23 26,23 30,23 38,23 42,23 46,23 50,23 54,23 66,23 70,23 74,23 78,23 86,23 106,23 110,23 114,23 150,23 154,23 158,23 162,23 170,23 174,23 178,23 182,23 186,23 194,23 198,23 202,23 246,23 254,23 258,23 262,23 266,23 270,23 282,23 286,23 290,23 294,23 302,23 306,23 310,23 2,27 6,27 30,27 38,27 42,27 46,27 50,27 54,27 66,27 70,27 74,27 78,27 86,27 94,27 102,27 106,27 110,27 114,27 122,27 154,27 158,27 162,27 170,27 174,27 178,27 182,27 186,27 194,27 198,27 202,27 206,27 210,27 242,27 246,27 254,27 258,27 262,27 266,27 270,27 282,27 286,27 290,27 294,27 302,27 306,27 310,27 314,27 2,31 6,31 38,31 42,31 46,31 50,31 54,31 78,31 86,31 106,31 110,31 114,31 154,31 158,31 162,31 186,31 194,31 198,31 202,31 206,31 210,31 214,31 218,31 246,31 254,31 258,31 262,31 266,31 270,31 294,31 302,31 306,31 310,31 314,31 2,35 6,35 78,35 86,35 98,35 102,35 106,35 110,35 114,35 186,35 194,35 198,35 202,35 206,35 210,35 214,35 218,35 246,35 294,35 302,35 306,35 310,35 314,35 2,39 6,39 78,39 86,39 98,39 102,39 106,39 110,39 114,39 186,39 194,39 198,39 202,39 206,39 210,39 214,39 218,39 246,39 294,39 302,39 306,39 310,39 314,39 2,43 6,43 38,43 42,43 46,43 50,43 54,43 78,43 86,43 98,43 106,43 110,43 114,43 154,43 158,43 162,43 186,43 194,43 198,43 202,43 206,43 210,43 214,43 218,43 246,43 254,43 258,43 262,43 266,43 270,43 294,43 302,43 306,43 310,43 314,43 2,47 6,47 30,47 38,47 42,47 46,47 50,47 54,47 66,47 70,47 74,47 78,47 86,47 98,47 110,47 114,47 154,47 158,47 162,47 170,47 174,47 178,47 182,47 186,47 194,47 198,47 202,47 206,47 210,47 214,47 242,47 246,47 254,47 258,47 262,47 266,47 270,47 282,47 286,47 290,47 294,47 302,47 306,47 310,47 314,47 2,51 6,51 22,51 26,51 30,51 38,51 42,51 46,51 50,51 54,51 66,51 70,51 74,51 78,51 86,51 102,51 110,51 114,51 150,51 154,51 158,51 162,51 170,51 174,51 178,51 182,51 186,51 194,51 198,51 202,51 206,51 246,51 254,51 258,51 262,51 266,51 270,51 282,51 286,51 290,51 294,51 302,51 306,51 310,51 314,51 2,55 6,55 18,55 22,55 26,55 30,55 38,55 42,55 46,55 50,55 54,55 66,55 70,55 74,55 78,55 86,55 98,55 110,55 114,55 134,55 138,55 146,55 150,55 154,55 158,55 162,55 170,55 174,55 178,55 182,55 186,55 194,55 198,55 202,55 210,55 246,55 254,55 258,55 262,55 266,55 270,55 282,55 286,55 290,55 294,55 302,55 306,55 310,55 314,55 2,59 6,59 18,59 22,59 30,59 42,59 46,59 50,59 54,59 66,59 70,59 74,59 78,59 98,59 110,59 114,59 134,59 138,59 146,59 150,59 154,59 158,59 162,59 170,59 174,59 178,59 182,59 186,59 194,59 198,59 206,59 222,59 246,59 258,59 262,59 266,59 270,59 282,59 286,59 290,59 294,59 306,59 310,59 314,59 2,63 6,63 18,63 34,63 38,63 42,63 46,63 50,63 54,63 66,63 70,63 74,63 78,63 86,63 98,63 114,63 202,63 222,63 2,67 6,67 18,67 38,67 42,67 46,67 62,67 66,67 70,67 74,67 78,67 86,67 102,67 214,67 2,71 6,71 122,71 206,71 222,71 63,74.211 39.959,75 126,75 130,75 134,75 138,75 142,75 146,75 150,75 154,75 166,75 170,75 174,75 178,75 182,75 186,75 194,75 198,75 202,75 270,75 274,75 278,75 282,75 286,75 290,75 294,75 302,75 306,75 310,75 314,75 318,75 31.5,75.35 32.6,75.35 64.9,75.997 31.5,76.45 32.6,76.45 60.1,76.956 62.138,78.571 2,79 6,79 90,79 126,79 134,79 138,79 142,79 146,79 150,79 154,79 166,79 170,79 174,79 178,79 182,79 186,79 190,79 194,79 262,79 266,79 270,79 274,79 278,79 282,79 286,79 290,79 294,79 298,79 302,79 306,79 310,79 314,79 318,79 322,79 97.2,79.4 99.924,79.4
MAG1: P802.1 R801.2 | length 10.7
  Bottom Layer w0.254: R801.2@99.275,6.3 99.1,6.475 99.1,13.6 100.75,15.25 P802.1@101.75,15.25